# Altium PCB TEST_PCB_GRP.PcbDoc
Units mil, origin at the board's own origin, x right, y up, seen from the top; angles counter-clockwise.
Board outline 6000 x 4000 mil, 2 copper layers (Top Layer, Bottom Layer); 24 components, 19 nets, 101 pads, 0 vias.
Unrouted connection lines stored in the file: 55.
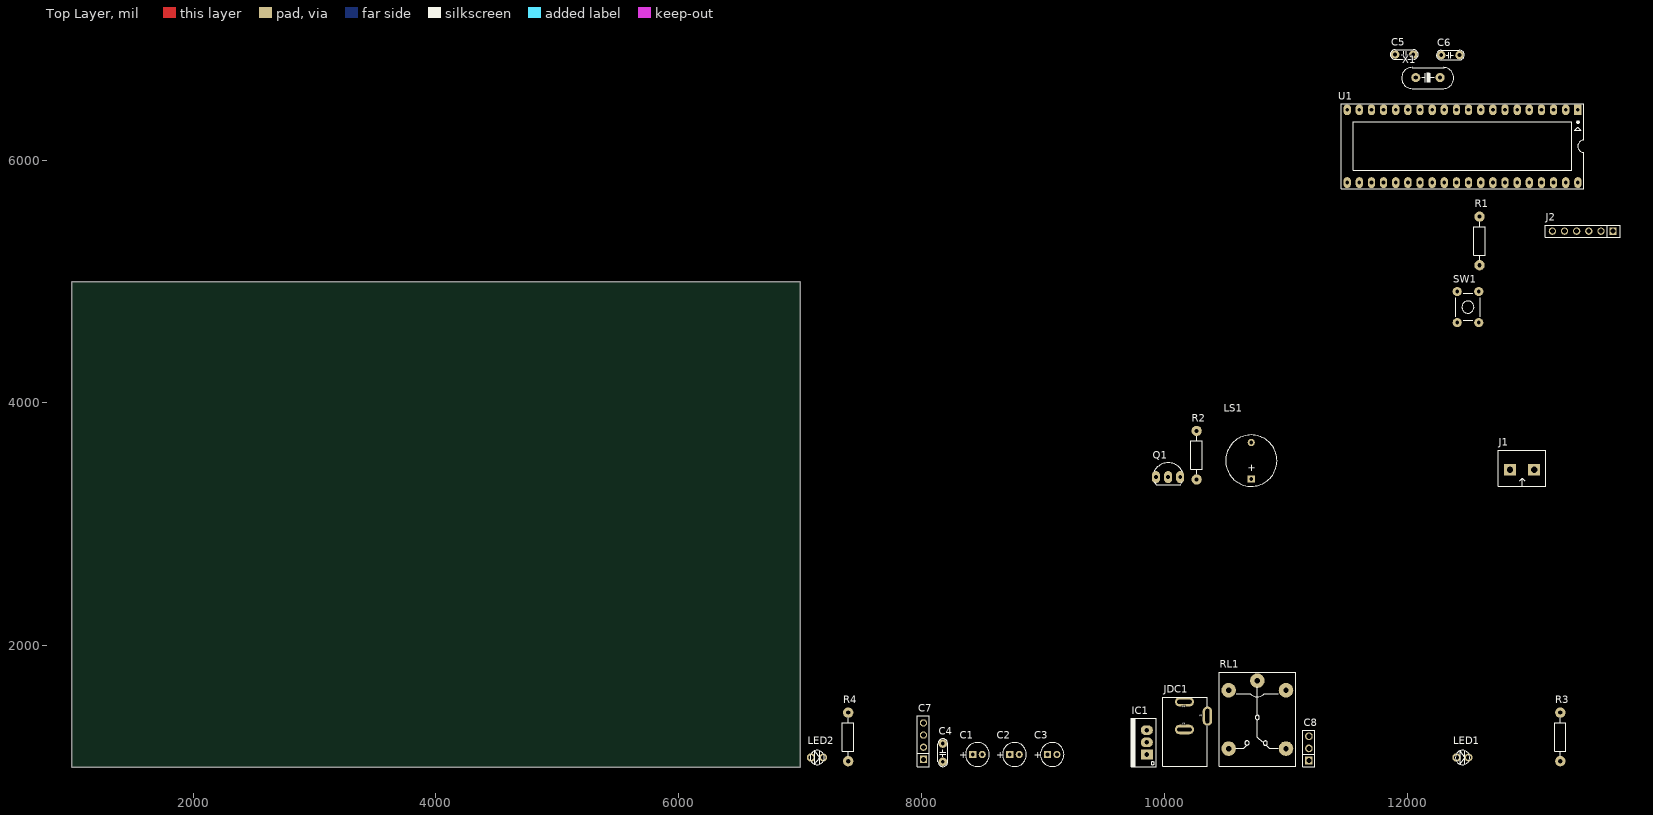
[diagram p0: Top Layer view]
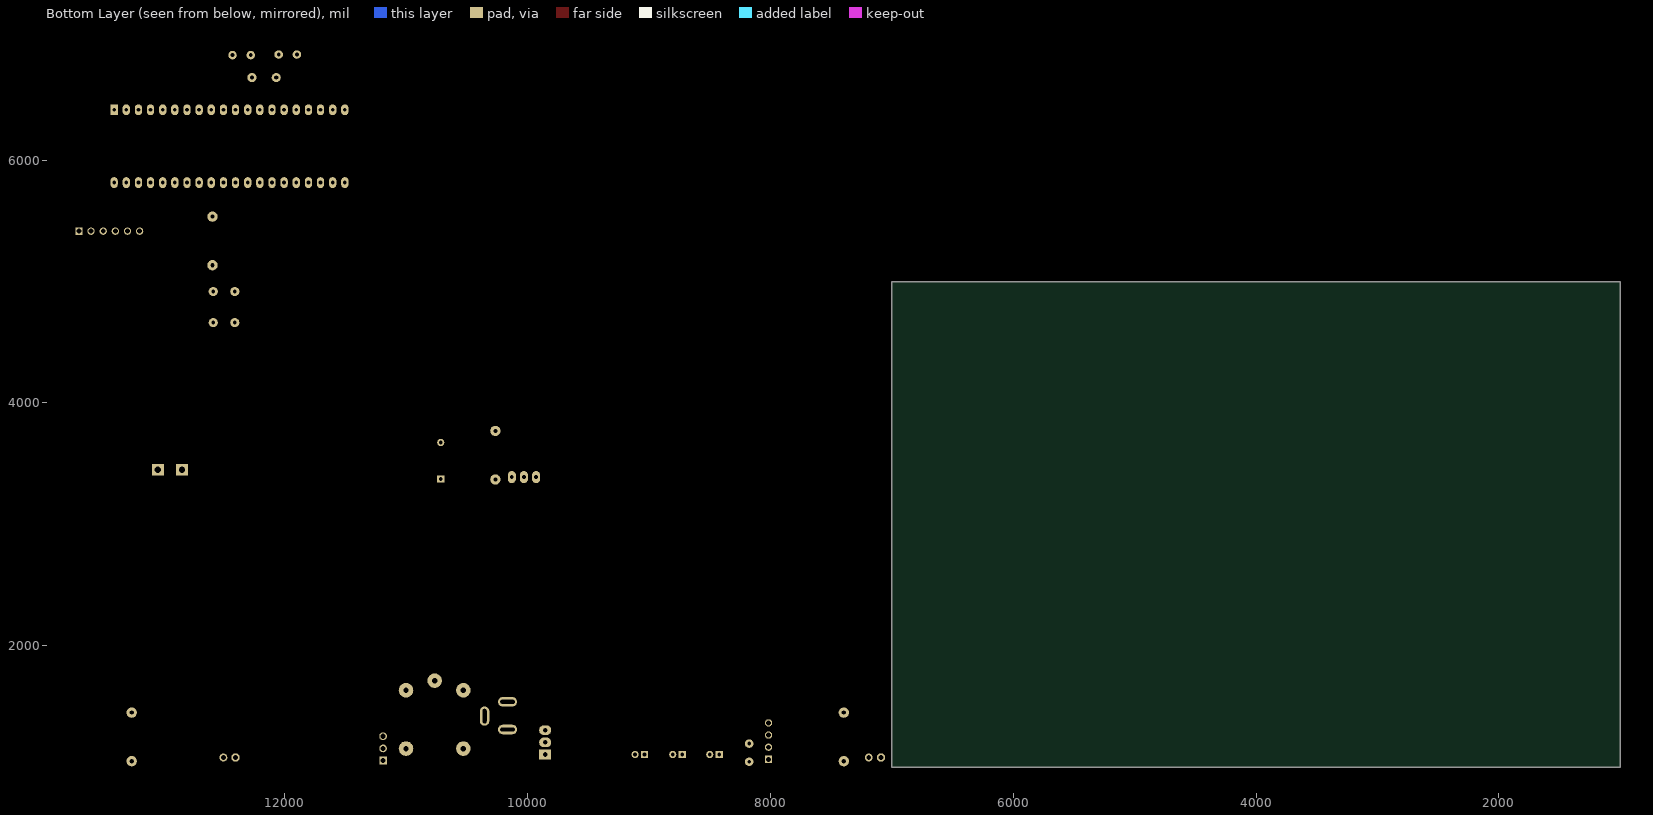
[diagram p1: Bottom Layer view, seen from below]

## Layer stack, top to bottom
Top Solder: solder mask 0.4, Solder Resist, Dk 3.5
Top Layer: signal copper 1.4
Dielectric 1: dielectric 12.6, FR-4, Dk 4.8
Bottom Layer: signal copper 1.4
Bottom Solder: solder mask 0.4, Solder Resist, Dk 3.5

## Board outline
1000,1000 7000,1000 7000,5000 1000,5000

## Design rules (kind name [scope] priority, off if disabled: settings)
Clearance [All] p1: gap=10 ignorepadtopadclearanceinfootprint=FALSE
PolygonConnect [All] p1: connectstyle=Relief reliefconductorwidth=10 reliefentries=4 polygonreliefangle="90 Angle" airgapwidth=10
RoutingVias [All] p1: holewidth=28 width=50 viastyle="Through Hole" minholewidth=28 minwidth=50 maxholewidth=28 maxwidth=50
SolderMaskExpansion [All] p1: expansion=4 istentingtop=FALSE
SupplyNets "Schematic Supply Nets_1" [InNet('+5')] p1: voltage=0.000
SupplyNets "Schematic Supply Nets" [InNet('GND')] p2: voltage=0.000
Width [All] p1: maxlimit=10 minlimit=10 preferedwidth=10
30 further rules are at their usual default settings.

## Components (designator, comment, footprint, x,y, rotation, side; value= is the part's Value field where it differs from the comment)
C1 "100uF" CA-ALU-5 8460,1105 r0 top value=104
C2 "10uF" CA-ALU-5 8765,1105 r0 top value=104
C3 "10uF" CA-ALU-5 9075,1105 r0 top value=104
C4 "0.1uF" CN1.5 8175,1115 r90 top value=33pF
C5 "20pF" CN1.5 11980,6870 r180 top value=33pF
C6 "20pF" CN1.5 12350,6865 r0 top value=33pF
C7 "Flame sensor" JP4-C1T 8015,1065 r90 top
C8 "Servo" JP3-D1T 11190,1055 r90 top
IC1 "LM7805" TO220-123 9855,1105 r90 top
J1 "BAT" KF2-5.08 12945,3450 r0 top
J2 "PICKIT" JP6-C1T 13695,5415 r180 top
JDC1 "Jac DC" DC0 10165,1425 r90 top
LED1 "LED" LED-3MM-RED 12455,1080 r0 top value="LED 3 ly Single Colour"
LED2 "LED" LED-3MM-RED 7140,1080 r0 top value="LED 3 ly Single Colour"
LS1 "Speaker" SPEAKER 10715.5,3375 r90 top
Q1 "C1815" TO92-123 10030,3390 r0 top
R1 "10k" RES-1/4W 12600,5350 r90 top
R2 "1k" RES-1/4W 10270,3585 r90 top
R3 "1k" RES-1/4W 13265,1265 r90 top
R4 "Res" RES-1/4W 7400,1265 r90 top
RL1 "Relay 10A/12V" "Relay - SRD-03VDC-SL-C" 10765,1410 r90 top value="Relay SPDT, 10A, 12V"
SW1 "SW" SW2-DIP 12500,4790 r90 top value="SW chip 2 pin"
U1 "PIC16F887A" DIP40/W0.6 13405,6415 r180 top
X1 "20MHz" XT2 12170,6680 r180 top value=4Mhz

## Footprints (in the part's own frame and the unit in brackets; to place one, negate y for a bottom-side part, rotate by r counter-clockwise, add the part's x,y. Pads: shape width x height; smd on the part's side, far side on the other; paste and mask are expansions set on the pad)
CA-ALU-5 [mm] "Polarized capacitors, Aluminum Electrolytic Capacitors, 2-Leads, Body 5x11x2x0.5"
  rect 1.5x1.5 hole 0.8: 1(-1,0)
  round 1.5 hole 0.8: 2(1,0)
  silkscreen extent -2.5,-2.5 2.5,2.5, body extent -2.41,-2.5 2.59,2.5, height 11
CN1.5 [mil]
  round 70 hole 31: 1(-70,0) 2(80,0)
  silkscreen extent -110,-40 120,40, body extent -110,-33 120,33, height 235
DC0 [mm] "Jac DC input"
  oval 2x4 hole 0.8 slot 3 at 90 deg: 1(2.9,0) 2(-2.9,0)
  oval 4x2 hole 0.8 slot 3 at 0 deg: 3(-0.1,-4.8)
  silkscreen extent -10.6,-4.8 3.9,4.5, body extent -10.6,-4.9 3.9,4.5, height 10.7
DIP40/W0.6 [mil] "40 PIN, W 600mil, Pin to pin 100mil"
  rect 60x90 hole 31: 1(0,0)
  oval 60x90 hole 31: 2(100,0) 3(200,0) 4(300,0) 5(400,0) 6(500,0) 7(600,0) 8(700,0) 9(800,0) 10(900,0) 11(1000,0) 12(1100,0) 13(1200,0) 14(1300,0) 15(1400,0) 16(1500,0) 17(1600,0) 18(1700,0) 19(1800,0) 20(1900,0) 21(1900,600) 22(1800,600) 23(1700,600) 24(1600,600) 25(1500,600) 26(1400,600) 27(1300,600) 28(1200,600) 29(1100,600) 30(1000,600) 31(900,600) 32(800,600) 33(700,600) 34(600,600) 35(500,600) 36(400,600) 37(300,600) 38(200,600) 39(100,600) 40(0,600)
  silkscreen extent -50,-50 1950,650, body extent -82,-10 1982,600, height 224
JP3-D1T [mm] "3 pins, 1 row, straight, gold plating"
  rect 1.6x1.6 hole 1.1: 1(0,0)
  round 1.6 hole 1.1: 2(2.54,0) 3(5.08,0)
  silkscreen extent -1.27,-1.27 6.35,1.27, body extent -1.27,-1.27 6.35,1.27, height 8.54
JP4-C1T [mm] "4 row, straight, gold plating"
  rect 1.52x1.52 hole 1.02: 1(0,0)
  round 1.52 hole 1.02: 2(2.54,0) 3(5.08,0) 4(7.62,0)
  silkscreen extent -1.52,-1.27 9.14,1.27, body extent -1.52,-1.25 9.14,1.25, height 8.51
JP6-C1T [mm] "6 row, straight, gold plating"
  rect 1.52x1.52 hole 1.02: 1(0,0)
  round 1.52 hole 1.02: 2(2.54,0) 3(5.08,0) 4(7.62,0) 5(10.16,0) 6(12.7,0)
  silkscreen extent -1.52,-1.27 14.22,1.27, body extent -1.52,-1.25 14.22,1.25, height 8.51
KF2-5.08 [mm]
  rect 2.5x2.5 hole 1.3: 1(-2.54,0) 2(2.54,0)
  silkscreen extent -4.95,-3.43 4.95,4.08, body extent -5,-3.43 5,4.07, height 10
LED-3MM-RED [mil]
  oct 65x65 hole 40: 1(-50,0)
  round 65 hole 40: 2(50,0)
  silkscreen extent -59,-59 59,59, body extent -77,-77 67,80, height 181
"Relay - SRD-03VDC-SL-C" [mil] "19.1 x 15.5 x 15.3mm"
  round 120 hole 45: 1(302.94,0) 2(-256.12,-236.22) 3(-256.12,236.22) 4(224.2,236.22) 5(224.2,-236.22)
  silkscreen extent -401,-315 373,315, body extent -385,-297 351,297, height 588
RES-1/4W [mil]
  round 85 hole 35: 1(-215,5) 2(185,5)
  silkscreen extent -173,-42 141,52, body extent -227,-42 197,52, height 95
SPEAKER [mm]
  rect 1.5x1.5 hole 0.8: 1(0,0)
  round 1.5 hole 0.8: 2(7.62,0.013)
  silkscreen extent -1.55,-5.38 9.18,5.36, body extent -2.2,-6 13.24,6, height 3.5
SW2-DIP [mm] "SW button 4pin, 250 x250 mil"
  round 1.905 hole 0.787: 1(-3.25,2.25) 2(-3.25,-2.25) 3(3.25,-2.25) 4(3.25,2.25)
  silkscreen extent -2.79,-2.54 2.92,2.54, body extent -3.92,-3 3.92,3, height 15.1
TO92-123 [mil] "TO-92"
  oval 66x100 hole 32: 1(-100,0) 2(0,0) 3(100,0)
  silkscreen extent -117,-65 120,118, body extent -109,-66 109,95, height 245
TO220-123 [mil] "TO-220 - 1-2-3"
  rect 80x100 hole 39: 1(0,0)
  oval 80x100 hole 39: 2(100,0) 3(200,0)
  silkscreen extent -100,-76 300,130, body extent -95,-80 295,97, height 323
XT2 [mil] "Footpin for Crystal 2 pin"
  round 75 hole 34: 1(-100,0) 2(100,0)
  silkscreen extent -213,-83 217,90, body extent -216,-87 216,90, height 144

## Part data
C1 C2 C3: library part CN-ALU-DIP, "Capacitor (Semiconductor SIM Model)", LatestRevisionDate=17-Jul-2002, LatestRevisionNote="Re-released for DXP Platform.", PackageReference=C1206, Publisher="Altium Limited"
C4 C5 C6: library part CN
C7: library part JP4, "WR-PHD 2.54 mm Angled Socket Header", Manufacturer="W¨¹rth Elektronik eiSos GmbH", partNo=613004143121, ComponentLink1 Description=Manufacturer, ComponentLink1URL=http://www.we-online.com, ComponentLink2 Description=Datasheet, ComponentLink2URL=http://katalog.we-online.de/em/datasheet/6130xx143121.pdf, Created by="Karrer Zheng", Created Date="29 March 2013", NoPins=04
C8: library part JP3, "WR-PHD 2.54 mm Angled Socket Header", Manufacturer="W¨¹rth Elektronik eiSos GmbH", partNo=613003143121, ComponentLink1 Description=Manufacturer, ComponentLink1URL=http://www.we-online.com, ComponentLink2 Description=Datasheet, ComponentLink2URL=http://katalog.we-online.de/em/datasheet/6130xx143121.pdf, Created by="Karrer Zheng", Created Date="29 March 2013", NoPins=03
IC1: library part LM78xx, "Positive Voltage Regulator", ComponentLink1Description="Manufacturer Link", ComponentLink1URL=http://www.st.com/, ComponentLink2Description=Datasheet, ComponentLink2URL=http://www.st.com/stonline/products/literature/ds/2146/l78m05c.pdf, DatasheetVersion=Apr-1994, LatestRevisionDate=17-Jul-2002, LatestRevisionNote="Re-released for DXP Platform.", Note="Tab is connected to pin 3 (GND).", PackageDescription="TO, Thru-Hole, Vertical, Heatsink Mounted; 3 In-Line Leads; Pitch 2.54 mm; Pin sequence 1, 3, 2", PackageReference=ISOWATT220AB, PackageVersion=Jul-1998, Published=24-Aug-2001, Publisher="Altium Limited"
J1: library part KF2, Manufacturer="Würth Elektronik eiSos GmbH", partNo=691103110002, ComponentLink1 Description=Manufacturer, ComponentLink1URL=http://www.we-online.com, ComponentLink2 Description=Datasheet, ComponentLink2URL=http://katalog.we-online.de/em/datasheet/6911031100xx.pdf, Created by="Karrer Zheng", Created Date="29 October 2013", NoPins=2
J2: library part JP6, "WR-PHD 2.54 mm Angled Socket Header", Manufacturer="W¨¹rth Elektronik eiSos GmbH", partNo=613006143121, ComponentLink1 Description=Manufacturer, ComponentLink1URL=http://www.we-online.com, ComponentLink2 Description=Datasheet, ComponentLink2URL=http://katalog.we-online.de/em/datasheet/6130xx143121.pdf, Created by="Karrer Zheng", Created Date="29 March 2013", NoPins=06
JDC1: library part DCIN, "Jac DC input"
LED1 LED2: "LED Single colour Green and Red"
LS1: "Loudspeaker", LatestRevisionDate=17-Jul-2002, LatestRevisionNote="Re-released for DXP Platform.", PackageReference=PIN2, Published=24-Mar-1999, Publisher="Altium Limited"
Q1: library part C458, "NPN 600mW, ECB"
R1 R2 R3: library part Res, "Res", Manufacturer="Generic Components", Class=Passive, Published=08/06/2000, Publisher="Altium Hobart Technology Centre", SubClass=R
R4: Manufacturer="Generic Components", Class=Passive, Published=08/06/2000, Publisher="Altium Hobart Technology Centre", SubClass=R
RL1: library part "Relay 5", "Relay SPDT,10A - 12VDC 5 Pin"
SW1: library part SW2, "Switch button 2 pin"
U1: library part PIC16F887-PU, "Flash-Based, 8-Bit CMOS Microcontroller with nanoWatt Technology, 8K (x14-Bit words) Program Memory, 624 Bytes Data Memory, 35 I/O pins, 40-Pin PDIP, Standard VDD Range, Extended Temperature", Supplier Part Number 1=PIC16F887-E/P-ND, ComponentLink1Description=Datasheet, ComponentLink1URL=http://ww1.microchip.com/downloads/en/DeviceDoc/41291F.pdf, ComponentLink2Description="Packaging Specification", ComponentLink2URL=http://www.microchip.com/stellent/groups/techpub_sg/documents/packagingspec/en012702.pdf, ComponentLink3Description="Microchip.com Home", ComponentLink3URL=http://www.microchip.com/, DatasheetVersion="revF, Apr-2009", LatestRevisionDate=02-Dec-2009, LatestRevisionNote="Updated datasheet to version revF, Apr-2009.", PackageDescription="40-Lead Plastic Dual In-Line (P) - 600 mil Body [PDIP]", PackageReference=PDIP600-P40, PackageVersion="revBB, Aug-2009", Published=29-Jan-2009, Publisher="Altium Limited", Supplier 1=Digi-Key, Supplier 2=Farnell, Supplier Part Number 2=1703423
X1: library part XT2, "Crystal, 32.768 KHz, -40 to 85 degC, 3.2 x 1.5 x 0.9 mm SMD"

## Nets (pads, with @x,y where several pads share a name; then routed paths per layer and width w, separated by ;. In a path a pad name is that pad's centre, name@x,y a point inside that pad or via, vN(x,y) a via of type N, cw(c..) or ccw(c..) an arc to the next point about the centre after c; other vN are vias at no path point)
+5: C3.1 C4.2 C7.1 C8.2 IC1.3 J2.2 LS1.1 R1.2 R4.1 U1.11 U1.32
+12: C1.1 C2.1 IC1.1 RL1.1
+12_ADAP: JDC1.1 RL1.3 RL1.4
+12_BAT: J1.1 RL1.2
Analog_0: C7.4 U1.3
Buzzer: R2.1 U1.23
Digital_0: C7.3 U1.4
GND: C1.2 C2.2 C3.2 C4.1 C5.2 C6.2 C7.2 C8.1 IC1.2 J1.2 J2.3 JDC1.2 JDC1.3 LED1.2 LED2.2 Q1.1 RL1.5 SW1.1 SW1.4 U1.12 U1.31
NetLED1_1: LED1.1 R3.2
NetLED2_1: LED2.1 R4.2
NetLS1_2: LS1.2 Q1.2
NetQ1_3: Q1.3 R2.2
PGC: J2.5 U1.39
PGD: J2.4 U1.40
PWM: C8.3 U1.17
RST: J2.1 R1.1 SW1.2 SW1.3 U1.1
WARNING_LED: R3.1 U1.7
XTAL1: C5.1 U1.14 X1.2
XTAL2: C6.1 U1.13 X1.1
pads on no net: J2.6 U1.2 U1.5 U1.6 U1.8 U1.9 U1.10 U1.15 U1.16 U1.18 U1.19 U1.20 U1.21 U1.22 U1.24 U1.25 U1.26 U1.27 U1.28 U1.29 U1.30 U1.33 U1.34 U1.35 U1.36 U1.37 U1.38

## Text inside footprints (layer, text, board x,y; h text height)
C1: Top Overlay "+" at 8309.41,1075.98 h59.06
C2: Top Overlay "+" at 8614.41,1075.98 h59.06
C3: Top Overlay "+" at 8924.41,1075.98 h59.06
JDC1: Top Overlay "3" at 10310.67,1417.13 h19.68 r90; Top Overlay "2" at 10172.87,1350.2 h19.68 r90; Top Overlay "1" at 10172.87,1491.93 h19.68 r90
LS1: Top Overlay "+" at 10743.5,3430.5 h60 r90